# Altium PCB x-IMU3-SA-TRRS.PcbDoc
Units mm, origin at the board's own origin, x right, y up, seen from the top; angles counter-clockwise.
Board outline 60 x 10 mm, 2 copper layers (Top Copper, Bottom Copper), stack 0.32 mm thick; 3 components, 5 nets, 21 pads, 2 vias.
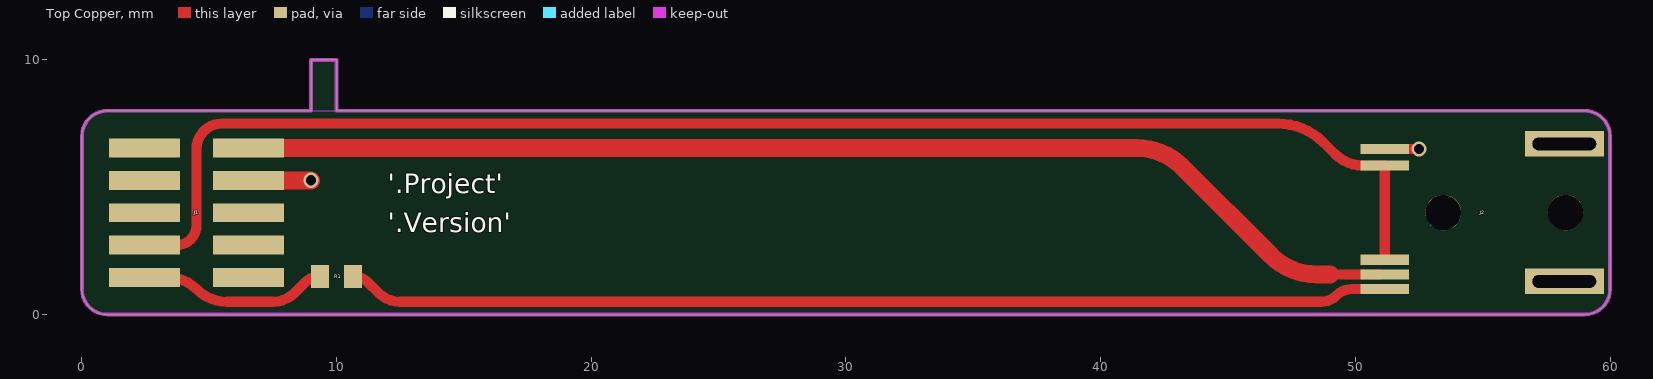
[diagram p0: Top Copper view]
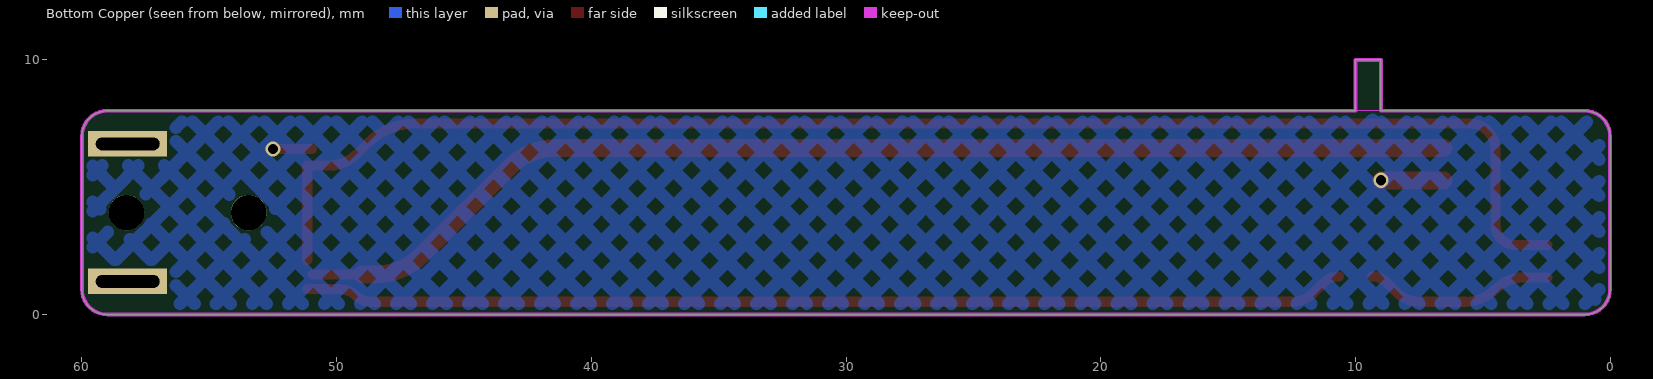
[diagram p1: Bottom Copper view, seen from below]
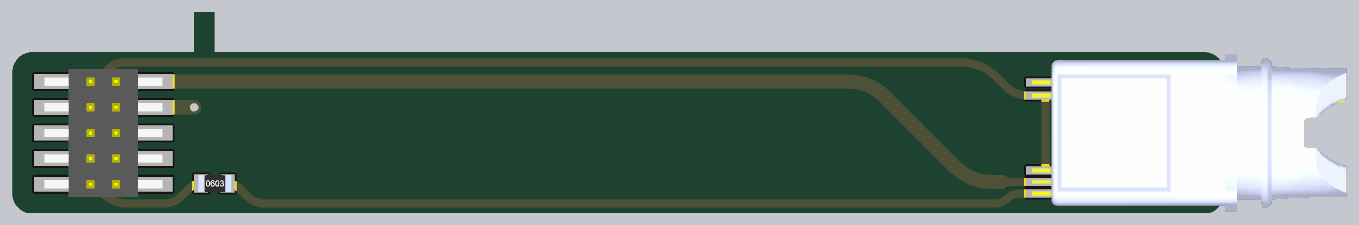
[diagram p2: 3D render of the assembled board from above, using the file's embedded part models]

## Layer stack, top to bottom
Top Coverlay: solder mask 0.0125, FC-001, Dk 4
Top Adhesive: prepreg 0.015, PP-006, Dk 4.1
Top Copper: signal copper 0.035
Polyimide: core 0.025, Core-009, Dk 4.5
Bottom Copper: signal copper 0.035
Bottom Adhesive: prepreg 0.015, PP-006, Dk 4.1
Bottom Coverlay: solder mask 0.0125, FC-001, Dk 4
Stiffener: core 0.195, Core-009, Dk 4.5

## Board outline
49,0 59,0 ccw(c59,1) 60,1 60,7 ccw(c59,7) 59,8 10,8 10,10 9,10 9,8 1,8 ccw(c1,7) 0,7 0,1 ccw(c1,1) 1,0 9,0
board region "Layer Stack Region 2": 59,8 49,8 49,0 59,0 59.098,0 59.292,0.038 59.474,0.114 59.637,0.223 59.777,0.363 59.886,0.526 59.962,0.708 60,0.902 60,1 60,7 60,7.098 59.962,7.292 59.886,7.474 59.777,7.637 59.637,7.777 59.474,7.886 59.292,7.962 59.098,8
board region "Layer Stack Region 1": 0,1 0,0.902 0.038,0.708 0.114,0.526 0.223,0.363 0.363,0.223 0.526,0.114 0.708,0.038 0.902,0 1,0 9,0 9,8 1,8 0.902,8 0.708,7.962 0.526,7.886 0.363,7.777 0.223,7.637 0.114,7.474 0.038,7.292 0,7.098 0,7
board region "Default Layer Stack Region": 9,0 49,0 49,8 10,8 10,10 9,10 9,8

## Design rules (kind name [scope] priority, off if disabled: settings)
Clearance [All] p1: gap=0.1 ignorepadtopadclearanceinfootprint=FALSE except(0: Arc-Hole Track-Hole SMDPad-Hole THPad-Hole Via-Hole Fill-Hole Poly-Hole Region-Hole Text-Hole)
DiffPairsRouting [All] p1: maxlimit=0.254 minlimit=0.1 mostfreqgap=0.1 substack1={A249E8CE-83D1-4C05-B82D-9113AA612842} toplayer_{a249e8ce-83d1-4c05-b82d-9113aa612842}_minwidth=0.381 toplayer_{a249e8ce-83d1-4c05-b82d-9113aa612842}_maxwidth=0.381 toplayer_{a249e8ce-83d1-4c05-b82d-9113aa612842}_prefwidth=0.381 bottomlayer_{a249e8ce-83d1-4c05-b82d-9113aa612842}_minwidth=0.381 bottomlayer_{a249e8ce-83d1-4c05-b82d-9113aa612842}_maxwidth=0.381 bottomlayer_{a249e8ce-83d1-4c05-b82d-9113aa612842}_prefwidth=0.381 toplayer_minwidth=0.1 toplayer_maxwidth=0.381 toplayer_prefwidth=0.1 bottomlayer_minwidth=0.1 bottomlayer_maxwidth=0.381 bottomlayer_prefwidth=0.1 maxuncoupledlength=12.7
HoleSize [All] p1: absolutevalues=TRUE maxlimit=10 minlimit=0.025 maxpercent=80.000 minpercent=20.000
MinimumSolderMaskSliver [All] p1: minsoldermaskwidth=0
PlaneClearance [All] p1: clearance=0.2
PlaneConnect [All] p1: planeconnectstyle=Direct reliefexpansion=0.508 reliefentries=4 reliefconductorwidth=0.254 reliefairgap=0.254
PolygonConnect [All] p1: thpad.connectstyle=Relief thpad.reliefconductorwidth=0.254 thpad.reliefentries=4 thpad.polygonreliefangle="90 Angle" thpad.airgapwidth=0.1 smdpad.connectstyle=Relief smdpad.reliefconductorwidth=0.254 smdpad.reliefentries=4 smdpad.polygonreliefangle="90 Angle" smdpad.airgapwidth=0.1 via.connectstyle=Direct via.reliefconductorwidth=0.254 via.reliefentries=4 via.polygonreliefangle="90 Angle" via.airgapwidth=0.254
RoutingVias [All] p1: holewidth=0.711 width=1.27 viastyle="Through Hole" minholewidth=0.2 minwidth=0.4 maxholewidth=0.711 maxwidth=1.27
SilkToSolderMaskClearance [IsPad] p1: minsilkscreentomaskgap=0.1 clearancetoexposedcopper=TRUE
SolderMaskExpansion [All] p1: expansion=0.102 istentingtop=FALSE
SupplyNets "Schematic Supply Nets_1" [InNet('GND')] p1: voltage=0.000
SupplyNets "Schematic Supply Nets" [InNet('3.3V')] p2: voltage=0.000
Width [All] p1: maxlimit=1 minlimit=0.1 preferedwidth=0.1 substack1={A249E8CE-83D1-4C05-B82D-9113AA612842}
24 further rules are at their usual default settings.

## Components (designator, comment, footprint, x,y, rotation, side; value= is the part's Value field where it differs from the comment)
J1 "FTS-105-03-F-DV" FTS-105-03-F-DV 4.5,4 r90 top
J2 "SJ-3554A-SMT-TR-67" SJ-3554A-SMT-TR-67 58.25,4 r90 top
R1 "0R" "Resistor 0603" 10,1.5 r0 top

## Footprints (in the part's own frame and the unit in brackets; to place one, negate y for a bottom-side part, rotate by r counter-clockwise, add the part's x,y. Pads: shape width x height; smd on the part's side, far side on the other; paste and mask are expansions set on the pad)
FTS-105-03-F-DV [mm]
  rect 0.74x2.79 smd: 1(-2.54,-2.035) 2(-2.54,2.035) 3(-1.27,-2.035) 4(-1.27,2.035) 5(0,-2.035) 6(0,2.035) 7(1.27,-2.035) 8(1.27,2.035) 9(2.54,-2.035) 10(2.54,2.035)
  body extent -3.17,-2.92 3.18,2.92, height 2.91
"Resistor 0603" [mm]
  rect 0.7x0.9 smd: 1(-0.65,0) 2(0.65,0)
  body extent -0.8,-0.42 0.84,0.43, height 0.44
SJ-3554A-SMT-TR-67 [mm]
  rect 0.4x1.9 smd: 1(2.5,7.1) 2(-1.85,7.1) 3(-2.425,7.1) 4(-3,7.1) 5(1.85,7.1)
  rect 1x3.1 hole 0.5 slot 2.5 at 90 deg: ""(-2.7,0.05) ""(2.7,0.05)
  round 1.4 hole 1.4 unplated: ""(0,4.8) ""(0,0)
  body extent -3.89,-7.8 3.89,7.75, height 4.65

## Part data
R1: library part Resistor

## Via types
v1: diameter 0.6, hole 0.4, Top Copper to Bottom Copper, tented both sides, 2 vias

## Nets (pads, with @x,y where several pads share a name; then routed paths per layer and width w, separated by ;. In a path a pad name is that pad's centre, name@x,y a point inside that pad or via, vN(x,y) a via of type N, cw(c..) or ccw(c..) an arc to the next point about the centre after c; other vN are vias at no path point)
3.3V: J1.9 J2.3 | length 46.3
  Top Copper w0.4: 49,1.575 J2.3@50.95,1.575
  Top Copper w0.7: J1.9 41.408,6.54 cw(c41.408,4) 43.204,5.796 46.681,2.319 ccw(c48.477,4.115) 48.477,1.575 49,1.575
GND: J1.7 J2.1 | length 4
  Top Copper w0.381: J2.1@50.95,6.5 v1(52.5,6.5)
  Top Copper w0.7: J1.7 v1(9,5.27)
RX: J1.4 J2.2 J2.5 | length 57
  Top Copper w0.4: J1.4 3.73,2.73 ccw(c3.73,3.5) 4.089,2.819 ccw(c3.73,3.5) 4.411,3.141 ccw(c3.73,3.5) 4.5,3.5 4.5,6.5 cw(c5.5,6.5) 5.5,7.5 46.948,7.5 ; 47,7.5 46.948,7.5 ; J2.2 J2.5 50.291,5.85 cw(c50.291,7.397) 49.197,6.303 48.744,6.756 ccw(c46.948,4.96) 46.948,7.5
TX: J2.4 R1.2 | length 41
  Top Copper w0.4: R1.2 cw(c10.65,0.655) 11.247,1.253 11.646,0.854 ccw(c12.5,1.707) 12.5,0.5 48.646,0.5 ccw(c48.646,1.354) 49.249,0.749 ; 49.25,0.75 cw(c49.854,0.146) 49.854,1 J2.4
"TX R": J1.2 R1.1 | length 7.5
  Top Copper w0.4: J1.2 3.389,1.46 cw(c3.389,-0.111) 4.5,1 ccw(c5.707,2.207) 5.707,0.5 7.5,0.5 ccw(c7.5,1.707) 8.354,0.854 8.753,1.253 cw(c9.35,0.655) R1.1
pads on no net: J1.1 J1.3 J1.5 J1.6 J1.8 J1.10 J2.

## Polygon pours and split planes (outlines as drawn)
no net on Mechanical 1 "NONET_L-01_P-001" (solid): 1,0 cw(c1,1) 0,1 0,7 cw(c1,7) 1,8 9,8 9,0
no net on Mechanical 1 "NONET_L-01_P-001" (solid): 49,0 49,8 59,8 cw(c59,7) 60,7 60,1 cw(c59,1) 59,0
GND on Bottom Copper "GND_L02_P000" (hatched 45Degree grid 1 track 0.5, remove dead copper, pour order 0): 0,0 0,8 60,8 60,0
no net on Layer0 "Default Coverlay 1 Top" (split plane): 59,8 49,8 49,0 59,0 59.098,0 59.292,0.038 59.474,0.114 59.637,0.223 59.777,0.363 59.886,0.526 59.962,0.708 60,0.902 60,1 60,7 60,7.098 59.962,7.292 59.886,7.474 59.777,7.637 59.637,7.777 59.474,7.886 59.292,7.962 59.098,8 59,8
no net on Layer0 "Default Coverlay 1 Top" (split plane): 9,0 9,8 1,8 0.902,8 0.708,7.962 0.526,7.886 0.363,7.777 0.223,7.637 0.114,7.474 0.038,7.292 0,7.098 0,7 0,1 0,0.902 0.038,0.708 0.114,0.526 0.223,0.363 0.363,0.223 0.526,0.114 0.708,0.038 0.902,0 1,0
no net on Layer0 "Default Coverlay 1 Bottom" (split plane): 59,8 49,8 49,0 59,0 59.098,0 59.292,0.038 59.474,0.114 59.637,0.223 59.777,0.363 59.886,0.526 59.962,0.708 60,0.902 60,1 60,7 60,7.098 59.962,7.292 59.886,7.474 59.777,7.637 59.637,7.777 59.474,7.886 59.292,7.962 59.098,8 59,8
no net on Layer0 "Default Coverlay 1 Bottom" (split plane): 9,0 9,8 1,8 0.902,8 0.708,7.962 0.526,7.886 0.363,7.777 0.223,7.637 0.114,7.474 0.038,7.292 0,7.098 0,7 0,1 0,0.902 0.038,0.708 0.114,0.526 0.223,0.363 0.363,0.223 0.526,0.114 0.708,0.038 0.902,0 1,0
no net on Layer0 "Default Coverlay 2 Top" (split plane): 9,0 49,0 49,8 10,8 10,10 9,10
no net on Layer0 "Default Coverlay 2 Bottom" (split plane): 9,0 49,0 49,8 10,8 10,10 9,10

## Keep-outs
Keep-Out Layer:
  rectangle: 9,8 10,10
  lines w0.15: 0,1 ccw(c1,1) 1,0 59,0 ccw(c59,1) 60,1 60,7 ccw(c59,7) 59,8 10,8 10,10 9,10 9,8 1,8 ccw(c1,7) 0,7 0,1

## Silkscreen, mask and mechanical layers (free items; w line width, h text height)
Top Overlay:
  text "'.Project'" at 12,4.5 h1.3
  text "'.Version'" at 12,2.986 h1.3